# EAGLE board Voltage_Feedback v3 (EAGLE 9.7.0)
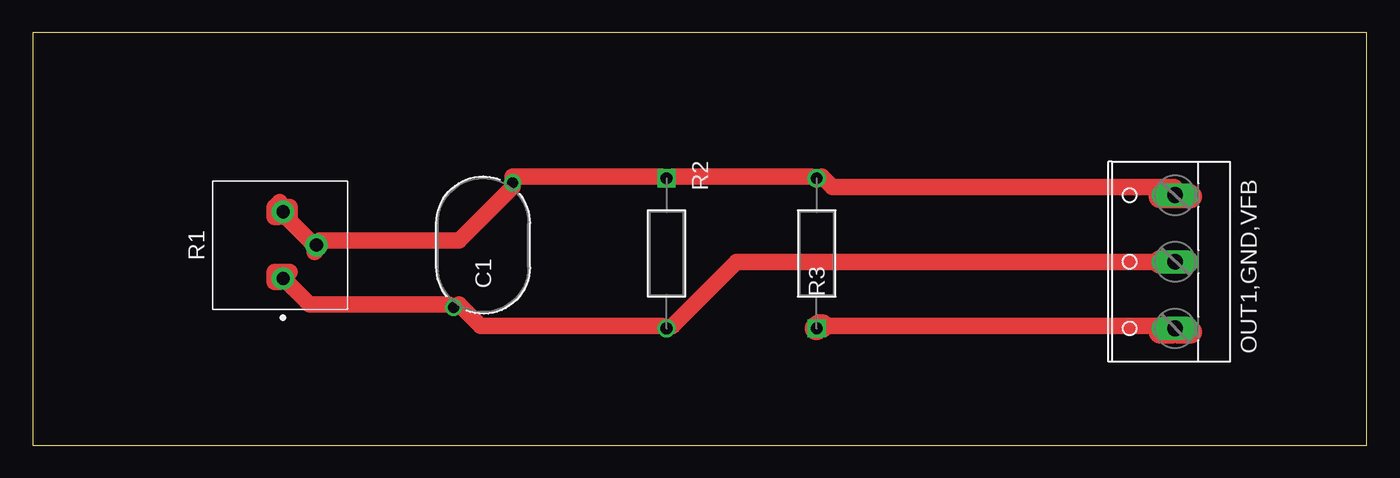
[diagram p0: board, top side]

Size 101.58 x 31.42 mm. Coordinates in mm from the lower left corner, seen from the top.
Outline: 0,0 101.58,0 101.58,31.42 0,31.42 0,0
Copper layers (1*16): Top / Bottom
Stack-up Default Layer Stack: Top User Defined 0.035mm / Dielectric-1 User Defined 1.5mm / Bottom User Defined 0.035mm
Design rules: minimum copper width 50mil, minimum drill size 0.35mm, copper clearance wire_polygon to wire_polygon 14mil, copper clearance wire_polygon to pad_smd 6mil, copper clearance wire_polygon to via 6mil, copper clearance pad_smd to pad_smd 6mil, copper clearance pad_smd to via 6mil, copper clearance via to via 6mil, copper clearance smd to pad (same net) 6mil, copper clearance smd to via (same net) 6mil, copper clearance smd to smd (same net) 6mil, dimension clearance 40mil, restrict clearance 0mil, via restrict clearance 0mil, drill distance 6mil, keepout clearance 0mil

## Footprints (pad centres in the part's own frame; a part is rotated, then mirrored left to right if it is on the bottom)
CAP_60GAD10_VIS = drill 0.813 pad 1.321: 1 -4.75,2.25; 2 4.75,-2.25
W237-133 = drill 1.194 long: 1 -5.08,-0.635; 2 0,-0.635; 3 5.08,-0.635
PV36P = drill 1 pad 1.7: 1 0,0; 2 2.54,-2.54; 3 5.08,0
STA_CF14_STP = drill 0.889 pad 1.397 square: 1 0,0 | drill 0.889 pad 1.397: 2 11.43,0

## Placement (x,y rotation side)
C1  564R60GAD10CAP_60GAD10_VIS  [CAP_60GAD10_VIS]  34.29,15.24 90 top
OUT1,GND,VFB  [W237-133]  86.36,13.97 90 top
R1  [PV36P]  19.05,12.7 90 top
R2  CF14JT10K0STA_CF14_STP  [STA_CF14_STP]  48.26,20.32 270 top
R3  CF14JT10K0STA_CF14_STP  [STA_CF14_STP]  59.69,8.89 90 top

## Library data of the parts
C1 = 2024-12-05_10-34-19_Library; COPYRIGHT: Copyright (C) 2024 Ultra Librarian. All rights reserved.; MANUFACTURER_PART_NUMBER: 564R60GAD10; MFR_NAME: Vishay
OUT1,GND,VFB = con-wago-508
R1 = Resistor; CATEGORY: Resistor; DESCRIPTION: Lead Sealed Type Multiturn PV36 Series; MANUFACTURER: BOURNS; MPN: PV36P; OPERATING_TEMPERATURE: -55 to +125 °C; PART_STATUS: Active; ROHS_COMPLIANCE: RoHS Compliant; SERIES: PV36; SUB-CATEGORY: Trimpot; TYPE: Lead Sealed
R2 R3 = 2024-12-04_14-13-54_Library; COPYRIGHT: Copyright (C) 2024 Ultra Librarian. All rights reserved.; MANUFACTURER_PART_NUMBER: CF14JT10K0; MFR_NAME: Stackpole International

## Nets
N$1: OUT1,GND,VFB.1 R3.1
N$2: C1.2 OUT1,GND,VFB.3 R1.2 R1.3 R2.1 R3.2
N$3: C1.1 OUT1,GND,VFB.2 R1.1 R2.2

## Tracks (layer width: path | path; a pad name or v marks a point on that pad's centre or on a via)
N$1
  Top 1.27: 60.1,9.09 86.92,9.09 OUT1,GND,VFB.1
  Top 1.778: 88.14,8.64 87.25,8.64 OUT1,GND,VFB.1 86.74,8.64 85.85,8.64 | R3.1 59.89,9.09 60.1,9.09
N$2
  Top 1.27: R1.3 19.46,17.22 21.08,15.6 R1.2 | OUT1,GND,VFB.3 86.92,19.66 60.91,19.66 60.1,20.47 R3.2 59.28,20.47 48.72,20.47 R2.1 47.9,20.47 36.52,20.47 C1.2 36.52,19.66 32.46,15.6 21.9,15.6 R1.2 | R1.3 19.43,18.16 19.56,18.16 19.56,17.4 | R1.2 21.59,14.86 21.46,14.73 | R1.3 18.67,17.4 18.41,17.4 18.41,18.16 18.8,18.54
  Top 1.778: 85.85,18.92 85.98,19.05 OUT1,GND,VFB.3 88.01,19.05 88.14,18.92 85.85,18.92
N$3
  Top 1.27: 85.85,13.97 53.59,13.97 48.72,9.09 R2.2 47.9,9.09 34.09,9.09 32.46,10.72 C1.1 31.65,10.72 21.08,10.72 19.46,12.34 R1.1 18.8,12.45 18.41,12.45 18.41,13.21 19.56,13.21
  Top 1.778: 87.76,13.97 OUT1,GND,VFB.2 85.85,13.97